# Altium PCB PCB1.PcbDoc
Units mm, origin at the board's own origin, x right, y up, seen from the top; angles counter-clockwise.
Board outline 42.16 x 42.13 mm, 3 copper layers (Top Layer, Mid-Layer 6, Bottom Layer); 19 components, 0 nets, 42 pads, 4 vias.
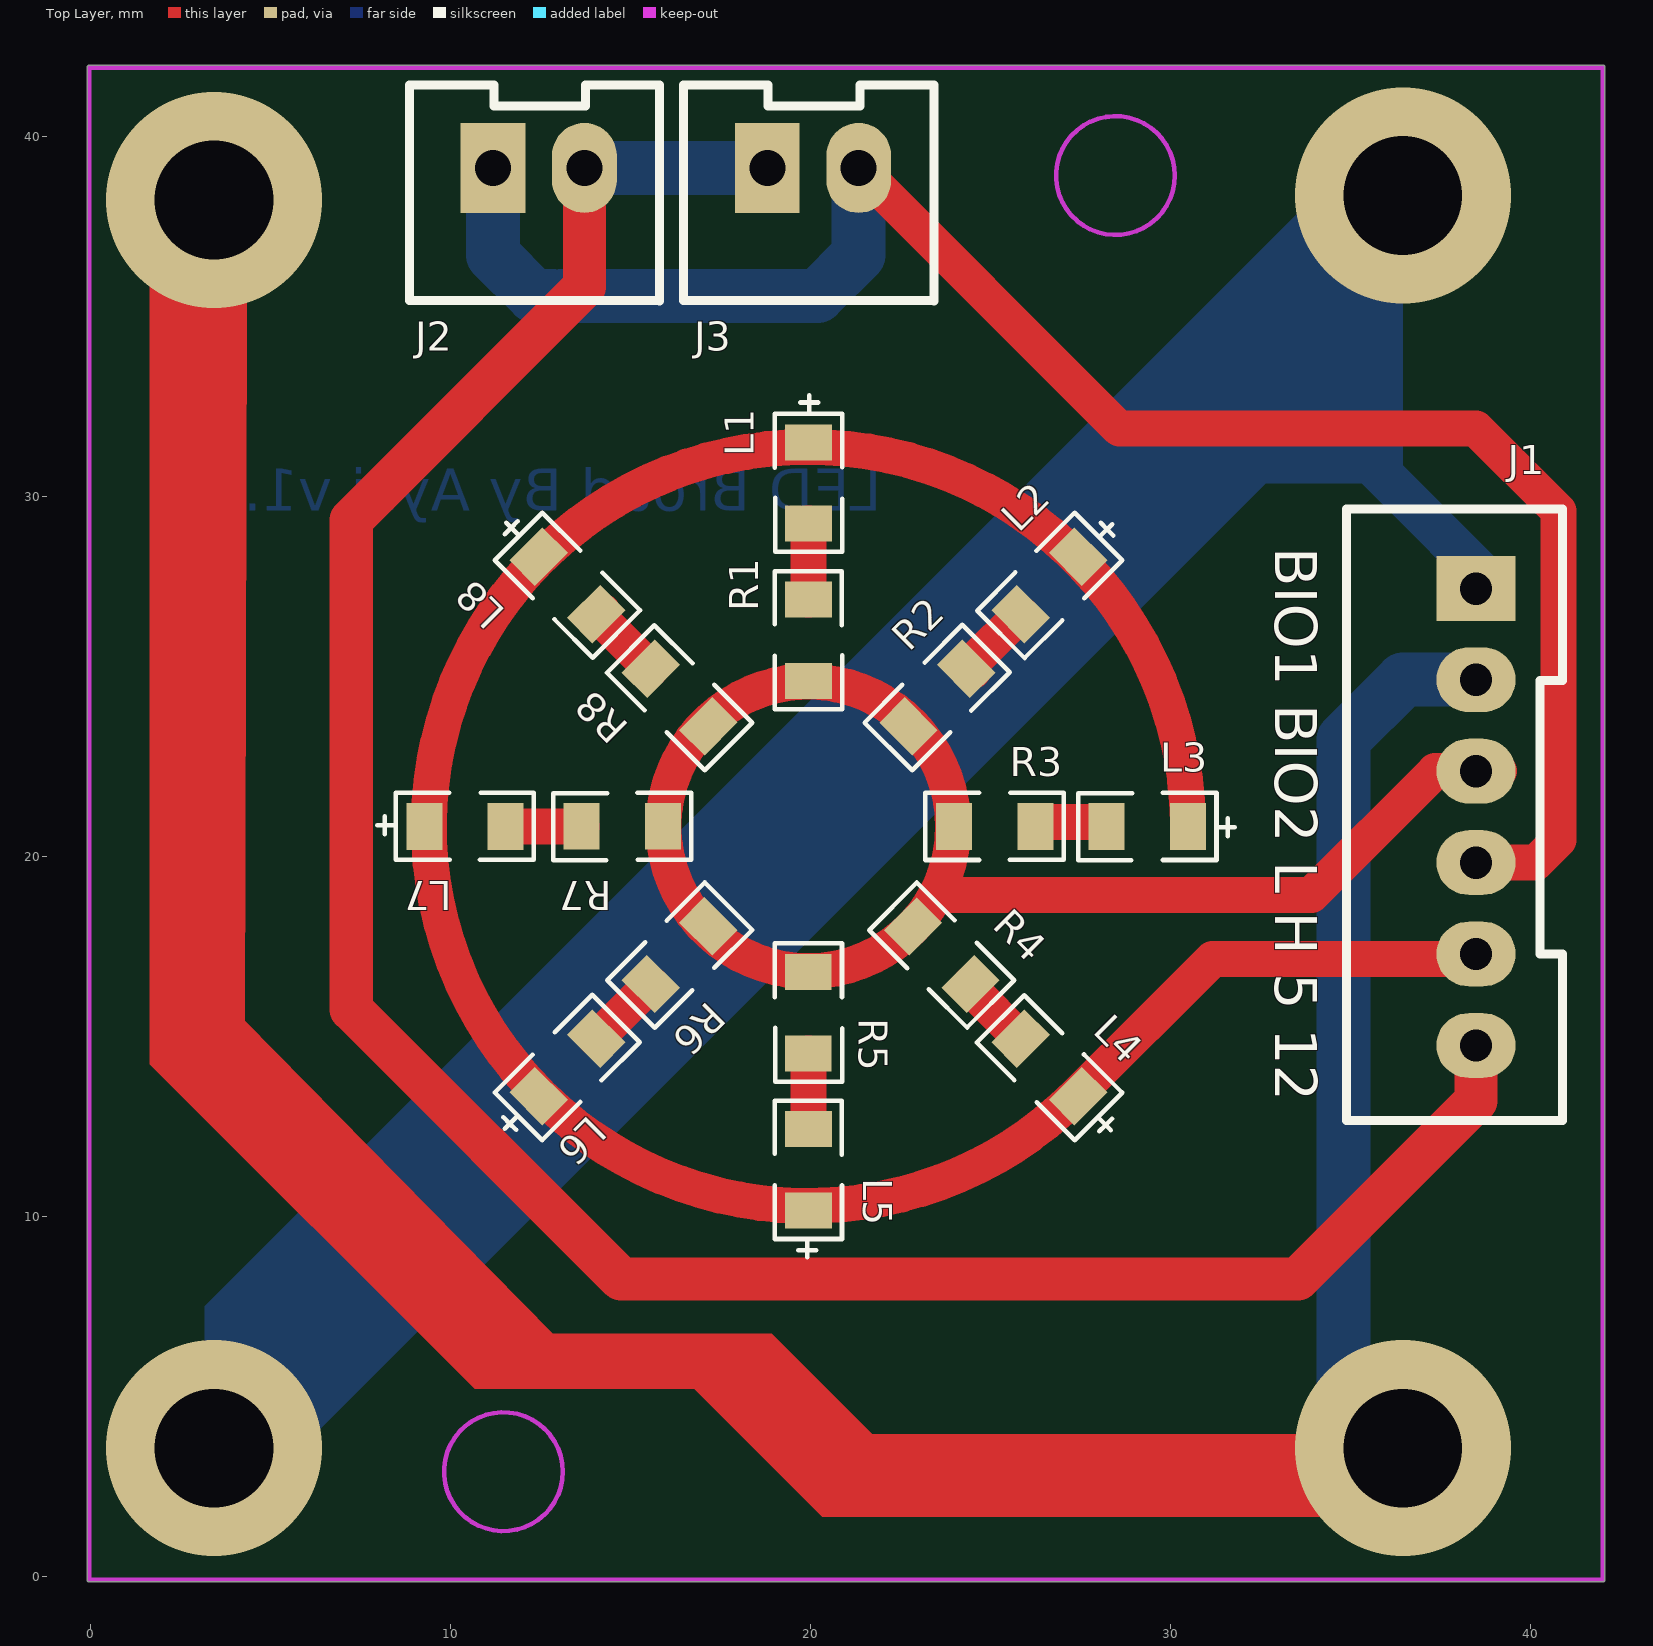
[diagram p0: Top Layer view]
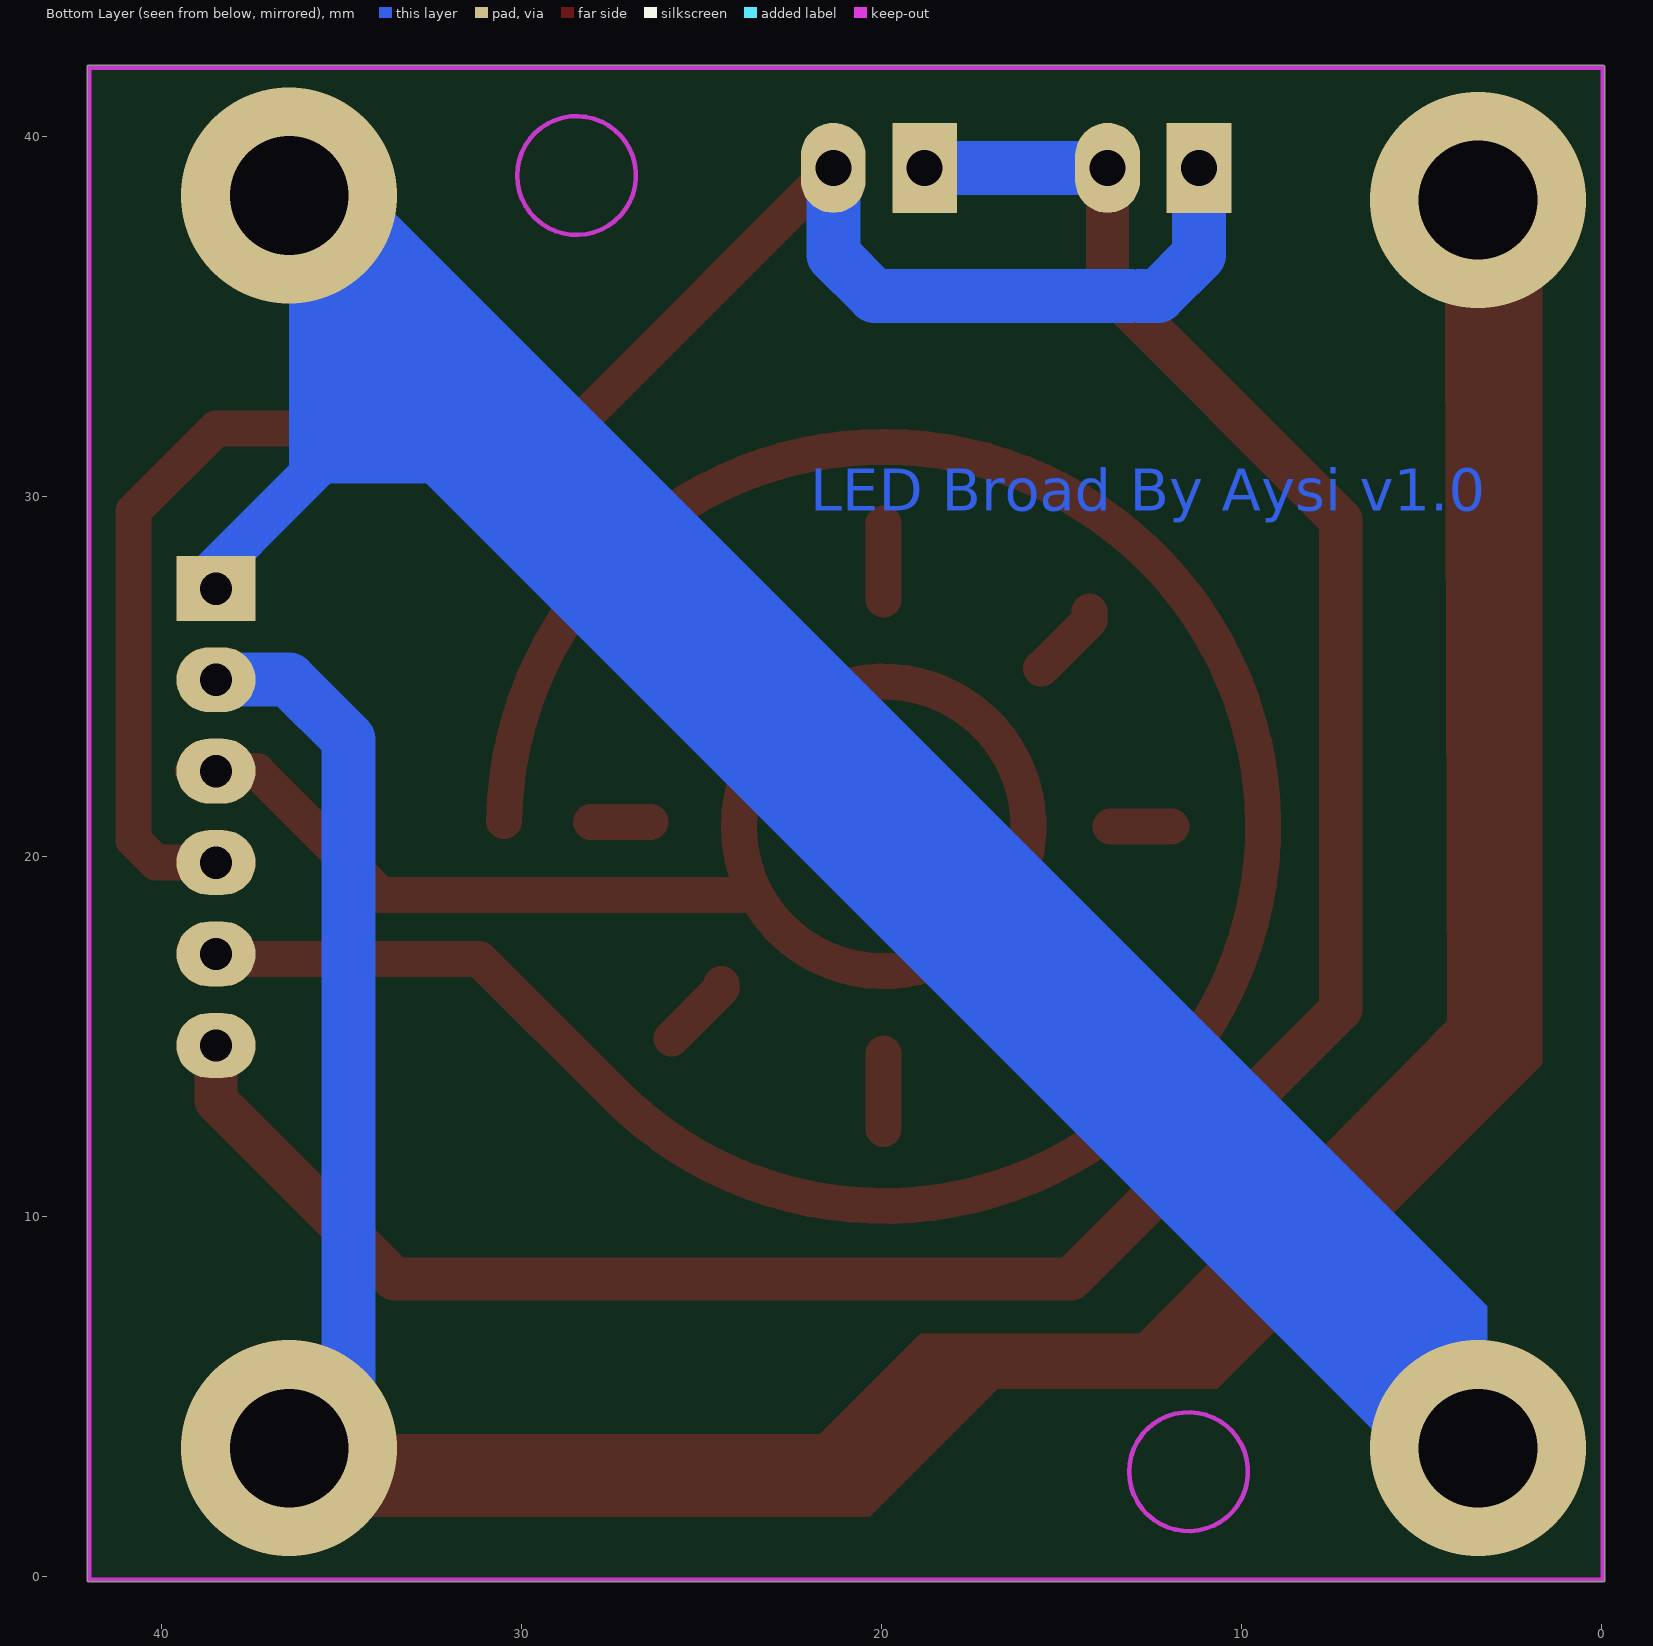
[diagram p1: Bottom Layer view, seen from below]

## Layer stack, top to bottom
Top Layer: signal copper 0.0356
Dielectric: dielectric 0.32, FR-4, Dk 4.8
Mid-Layer 6: signal copper 0.0356
Dielectric: dielectric 0.32, FR-4, Dk 4.8
Bottom Layer: signal copper 0.0356

## Board outline
-0.033,-0.16 cw(c-0.033,-0.096) -0.097,-0.096 -0.097,41.904 cw(c-0.033,41.904) -0.016,41.966 cw(c0,41.904) 0,41.968 41.973,41.968 cw(c41.999,41.91) 42.063,41.91 42.063,-0.096 cw(c41.999,-0.096) 41.999,-0.16

## Design rules (kind name [scope] priority, off if disabled: settings)
Clearance [All] p1: gap=0.254
PolygonConnect [All] p1: connectstyle=Relief reliefconductorwidth=0.254 reliefentries=4 polygonreliefangle="90 Angle"
RoutingVias [All] p1: holewidth=0.711 width=1.27 viastyle="Through Hole" minholewidth=0.711 minwidth=1.27 maxholewidth=3.3 maxwidth=6
SilkToSilkClearance [All] p1: silktosilkclearance=0
SilkscreenOverComponentPads [All] p1: minsilkscreentomaskgap=0
SolderMaskExpansion [All] p1: expansion=0.102
TestPointUsage [All] p1: valid=0 allowmultiple=FALSE
Testpoint [All] p1: side=15 testpointundercomponent=TRUE minsize=1.016 maxsize=2.54 preferedsize=1.524 minholesize=0 maxholesize=1.016 preferedholesize=0.813 testpointgrid=0.025 style=1023 order=0-112345678
Width [All] p1: maxlimit=0.254 minlimit=0.254 preferedwidth=0.254
22 further rules are at their usual default settings.

## Components (designator, comment, footprint, x,y, rotation, side; value= is the part's Value field where it differs from the comment)
J1 "COM6" 6PIN2.54 38.481,27.432 r270 top
J2 "COM2" 2PIN2.54 11.176,39.116 r0 top
J3 "COM2" 2PIN2.54 18.796,39.116 r0 top
L1 "Comment" D0805 19.939,31.496 r90 top
L2 "Comment" D0805 27.432,28.321 r45 top
L3 "Comment" D0805 30.48,20.828 r0 top
L4 "Comment" D0805 27.432,13.335 r315 top
L5 "Comment" D0805 19.939,10.16 r270 top
L6 "Comment" D0805 12.446,13.335 r225 top
L7 "Comment" D0805 9.271,20.828 r180 top
L8 "Comment" D0805 12.446,28.321 r135 top
R1 "2.2K" 0805 19.939,24.892 r90 top
R2 "2.2K" 0805 22.733,23.622 r45 top
R3 "2.2K" 0805 24.003,20.828 r0 top
R4 "2.2K" 0805 22.86,18.034 r315 top
R5 "2.2K" 0805 19.939,16.764 r270 top
R6 "2.2K" 0805 17.145,18.034 r225 top
R7 "2.2K" 0805 15.875,20.828 r180 top
R8 "2.2K" 0805 17.145,23.622 r135 top

## Footprints (in the part's own frame and the unit in brackets; to place one, negate y for a bottom-side part, rotate by r counter-clockwise, add the part's x,y. Pads: shape width x height; smd on the part's side, far side on the other; paste and mask are expansions set on the pad)
2PIN2.54 [mm]
  rect 1.8x2.5 hole 1: 1(0,0)
  oval 1.8x2.5 hole 1: 2(2.54,0)
  silkscreen extent -2.32,-3.69 4.63,2.3
6PIN2.54 [mm]
  rect 1.8x2.2 hole 0.9: 1(0,0)
  oval 1.8x2.2 hole 0.9: 2(2.53,0) 3(5.07,0) 4(7.61,0) 5(10.15,0) 6(12.69,0)
  silkscreen extent -2.21,-3.59 14.77,2.41, body extent -2.17,-3.57 14.77,2.25, height 10
0805 [mm]
  rect 1x1.3 smd: 1(-0.02,-0.002) 2(2.241,-0.002)
  silkscreen extent -0.81,-0.93 3.03,0.94, body extent 0,-0.55 2.25,0.55, height 1
D0805 [mm]
  rect 1x1.3 smd: 1(0,0) 2(-2.261,0)
  silkscreen extent -3.05,-0.94 1.3,0.93, body extent -2.27,-0.55 -0.02,0.55, height 1

## Via types
v1: diameter 6, hole 3.3, Top Layer to Bottom Layer, 4 vias

## Nets (pads, with @x,y where several pads share a name; then routed paths per layer and width w, separated by ;. In a path a pad name is that pad's centre, name@x,y a point inside that pad or via, vN(x,y) a via of type N, cw(c..) or ccw(c..) an arc to the next point about the centre after c; other vN are vias at no path point)
pads on no net: J1.1 J1.2 J1.3 J1.4 J1.5 J1.6 J2.1 J2.2 J3.1 J3.2 L1.1 L1.2 L2.1 L2.2 L3.1 L3.2 L4.1 L4.2 L5.1 L5.2 L6.1 L6.2 L7.1 L7.2 L8.1 L8.2 R1.1 R1.2 R2.1 R2.2 R3.1 R3.2 R4.1 R4.2 R5.1 R5.2 R6.1 R6.2 R7.1 R7.2 R8.1 R8.2
copper on no net: | length 272.9
  Top Layer w1: 11.936,20.83 13.634,20.83 ; 14.044,14.933 15.559,16.448 15.559,16.451 ; 14.224,26.543 15.559,25.208 15.562,25.208 ; 14.224,26.546 14.224,26.797 ; 19.937,14.523 19.937,12.423 19.939,12.421 ; 19.939,29.235 19.941,29.233 19.941,27.133 ; 20.955,39.497 28.575,31.877 38.481,31.877 40.767,29.591 40.767,24.257 ; 23.495,18.923 33.909,18.923 37.348,22.362 39.116,22.362 ; 24.443,16.448 24.443,16.324 25.834,14.933 ; 24.511,25.146 24.511,25.4 25.834,26.723 ; 26.416,20.955 28.067,20.955 ; 30.48,20.976 ccw(c19.939,20.828) 27.393,13.374 31.164,17.145 38.735,17.145 ; 38.481,19.822 40.142,19.822 40.767,20.447 40.767,24.511 ; 23.961,20.828 ccw(c19.939,20.828) 23.961,20.828
  Top Layer w1.2: 13.716,39.116 13.716,35.814 7.239,29.337 7.239,15.748 14.732,8.255 33.528,8.255 38.481,13.208 38.481,14.742
  Bottom Layer w1.5: 11.176,39.116 11.176,36.703 12.319,35.56 12.827,35.56 ; 13.081,35.56 20.193,35.56 21.336,36.703 21.336,39.116 ; 13.716,39.116 18.542,39.116 ; v1@34.798,4.191 34.798,23.241 36.459,24.902 38.481,24.902
  other v1: 3.429,3.556 36.449,3.556 3.429,38.227 36.449,38.354

## Keep-outs
Keep-Out Layer:
  circle w0.127: c11.467,2.904 r1.65
  circle w0.127: c28.467,38.904 r1.65
  lines w0.127: -0.033,41.904 -0.033,-0.096 41.999,-0.096 41.999,41.91 ; 0,41.904 41.999,41.904

## Other copper
Top Layer:
  region: 1.651,39.878 1.651,14.224 10.668,5.207 16.764,5.207 20.32,1.651 36.449,1.651 36.273,3.937 21.717,3.937 18.923,6.731 12.834,6.731 4.29,15.428 4.353,39.878
Bottom Layer:
  region: 34.036,38.354 3.175,7.493 3.175,3.937 6.223,3.937 36.449,34.163 36.449,38.354
  region: 39.243,28.067 36.449,30.861 36.449,35.306 32.639,31.496 32.639,30.353 35.306,30.353 39.116,26.543 39.243,26.543
  text "LED Broad By Aysi v1.0" at 21.971,29.21 h2

## Silkscreen, mask and mechanical layers (free items; w line width, h text height)
Top Overlay:
  text "BIO1 BIO2 L H 5 12" at 32.512,28.575 h2 r270
Mechanical 1:
  circle w0.127: c19.939,20.828 r9.525
  circle w0.127: c19.967,20.904 r15.5
  circle w0.127: c19.967,20.904 r13
  circle w0.127: c3.467,3.504 r1.65
  circle w0.127: c36.467,3.504 r1.65
  circle w0.127: c3.467,38.304 r1.65
  circle w0.127: c36.467,38.304 r1.65
  lines w0.127: 3.683,20.828 36.576,20.828 ; 6.477,7.366 19.939,20.828 ; 7.747,33.02 19.939,20.828 ; 19.939,3.81 19.939,20.828 ; 19.939,37.719 19.939,20.828 ; 31.623,32.512 19.939,20.828 ; 32.258,8.509 19.939,20.828